# EAGLE board LM2596 (EAGLE 9.1.0)
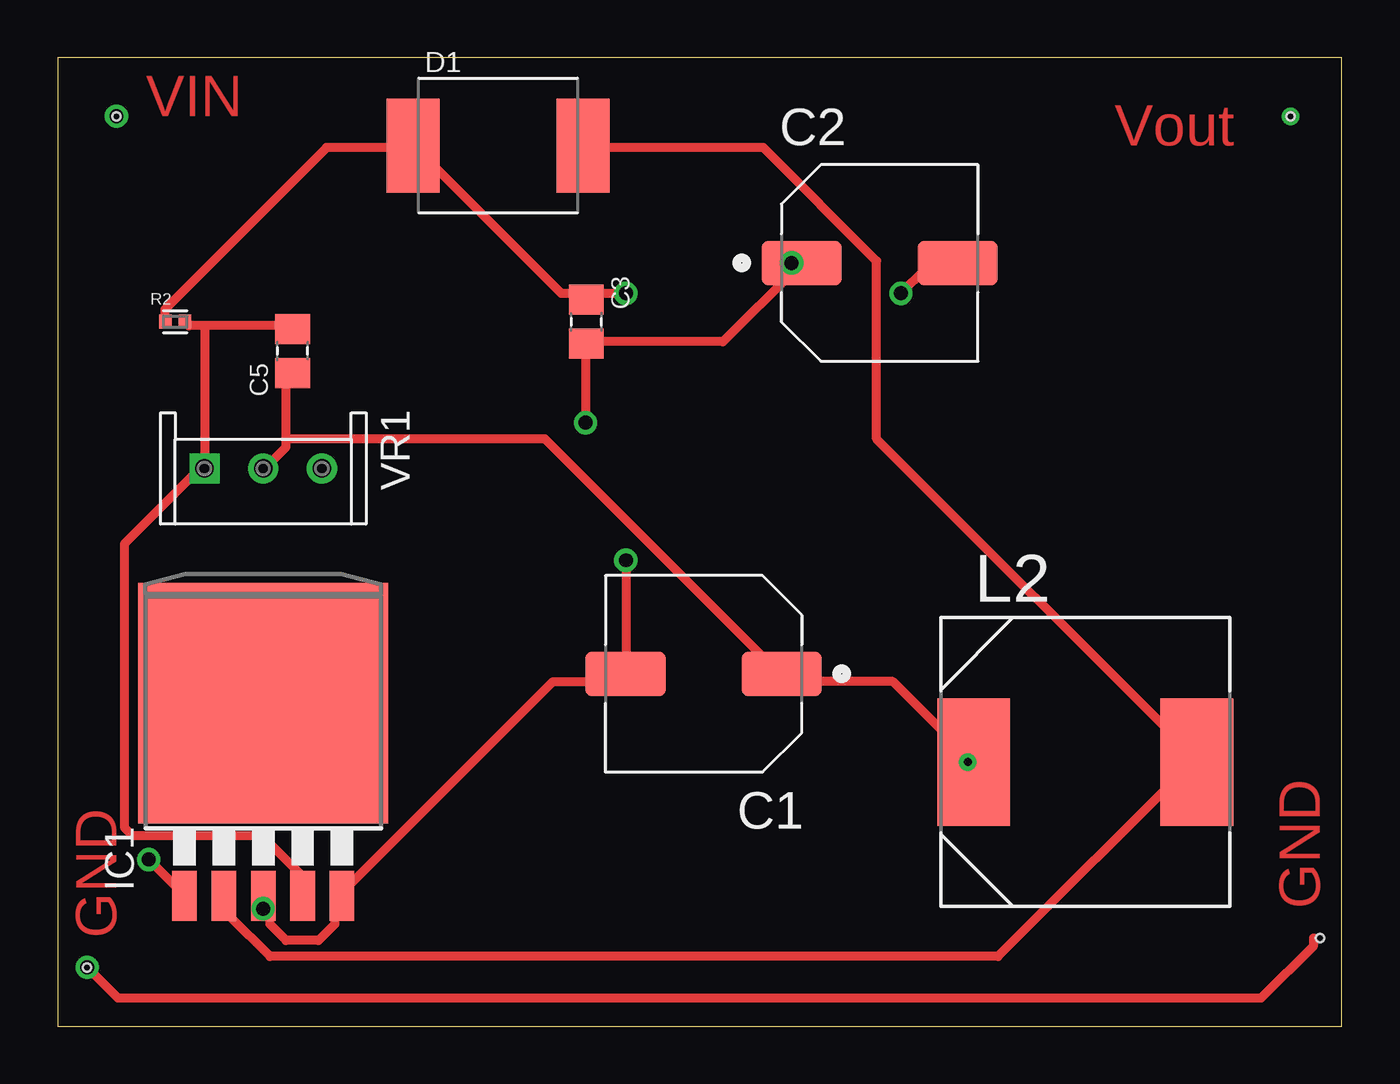
[diagram p0: board, top side]
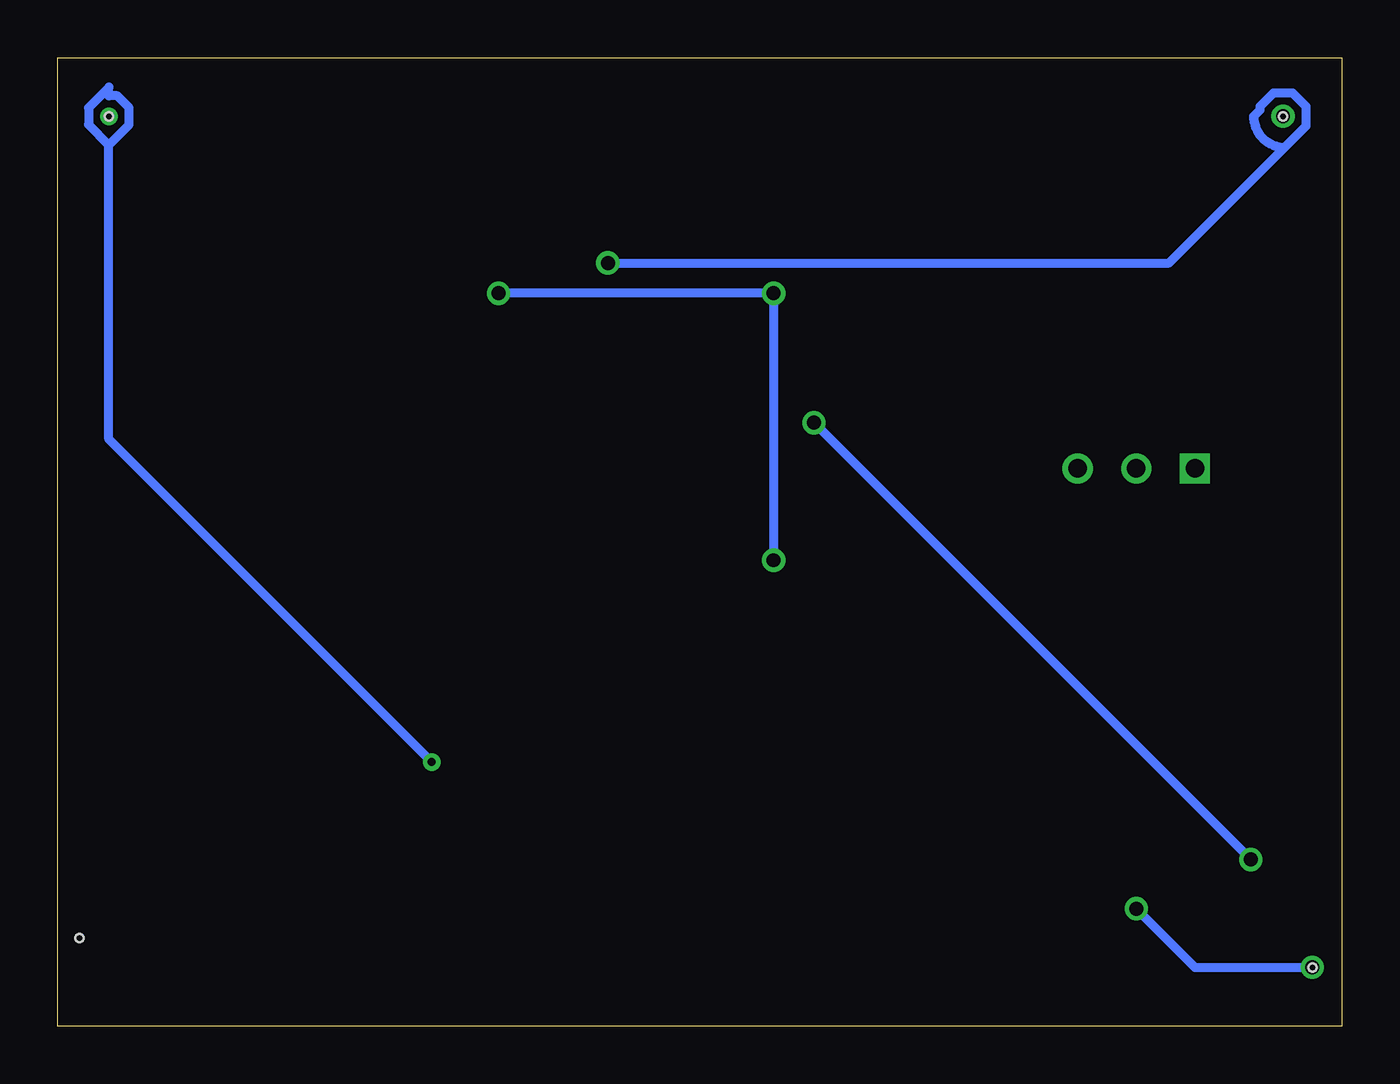
[diagram p1: board, bottom side, seen from below]

Size 55.55 x 41.9 mm. Coordinates in mm from the lower left corner, seen from the top.
Outline: 0,0 55.55,0 55.55,41.9 0,41.9 0,0
Copper layers (1*16): Top 0.035mm / dielectric 1.5mm / Bottom 0.035mm
Design rules "default": minimum track width 6mil, minimum drill 0.35mm, track to track 6mil, track to pad 6mil, pad to pad 6mil, via to via 6mil, smd to smd 6mil, copper to edge 40mil, drill to drill 6mil, minimum pad ring 10mil, minimum via ring 8mil, stop-mask expansion 4mil, vias tented up to drill 0mil, thermal gap 10mil
Net classes: 0 default: width 0.4 mm, drill 0.6 mm, clearance 0.3 mm
Holes 0.35 mm at 54.61,3.81 1.27,2.54 53.34,39.37 2.54,39.37

## Footprints (pad centres in the part's own frame; a part is rotated, then mirrored left to right if it is on the bottom)
CAPE830X690N = smd 3.46 x 1.92: 1 -3.375,0; 2 3.375,0
CAPC2012X135N = smd 1.3 x 1.5: 1 -0.95,0; 2 0.95,0
DO-214AB = smd 2.286 x 4.064: 1 -3.683,0; 2 3.683,0
TO263-5 = smd 1.067 x 2.159: 1 -3.404,-5.791; 2 -1.702,-5.791; 3 0,-5.791; 4 1.702,-5.791; 5 3.404,-5.791 | smd 10.8 x 10.41: 6 0,2.54
INDM125125X600N = smd 3.15 x 5.512: 1 -4.826,0; 2 4.826,0
RESC1005X40 = smd 0.54 x 0.6: 1 -0.43,0; 2 0.43,0
W = drill 0.8 square: 1 0,-2.54 | drill 0.8: 2 0,0; 3 0,2.54

## Placement (x,y rotation side)
C1  PCR1C221MCL1GS  [CAPE830X690N]  27.94,15.24 180 top
C2  PCR1C221MCL1GS  [CAPE830X690N]  35.56,33.02 0 top
C3  GRM219F51H104ZA01D  [CAPC2012X135N]  22.86,30.48 270 top
C5  GRM219F51H104ZA01D  [CAPC2012X135N]  10.16,29.21 90 top
D1  SMD-DIODE-SCHOTTKY-40V-3A(DO-214AB)  [DO-214AB]  19.05,38.1 0 top
IC1  LM2596S  [TO263-5]  8.89,11.43 0 top
L2  DR125-331-R  [INDM125125X600N]  44.45,11.43 0 top
R2  CH0402-330RGFPT  [RESC1005X40]  5.08,30.48 0 top
VR1  [W]  8.89,24.13 270 top

## Library data of the parts
C1 C2 = PCR1C221MCL1GS; AVAILABILITY: Unavailable; DESCRIPTION: 220uF 16V Polymer Aluminium Electrolytic Capacitor, CR Series 4000h 8.3x8.3x6.9mm; MF: Nichicon; MP: PCR1C221MCL1GS; PACKAGE: Radial Nichicon; PRICE: None
C3 C5 = GRM219F51H104ZA01D; AVAILABILITY: Good; DESCRIPTION: Capacitor: ceramic; MLCC; 100nF; 50V; Y5V; -20÷+80%; SMD; 0805; MF: Murata Electronics; MP: GRM219F51H104ZA01D; PACKAGE: 0805 Murata; PRICE: 0.04 USD
D1 = SMD-DIODE-SCHOTTKY-40V-3A_DO-214AB_; DESCRIPTION: Rectifier, Schottky; DO-214AB; 3.0A IF; 0.75V; 40V; 100A IFRM; 10000V/us; 1000pF; DIGI-KEY_PART_NUMBER: SS34-E3/57TGICT-ND; DIGI-KEY_PURCHASE_URL: https://www.digikey.ma/product-detail/en/vishay-semiconductor-diodes-division/SS34-E3-57T/SS34-E3-57TGICT-ND/1091684?utm_source=snapeda&utm_medium=aggregator&utm_campaign=symbol; MF: Vishay; MP: SS34-E3/57T; PACKAGE: DO-214 Vishay
IC1 = national-semiconductor; MF: NATIONAL SEMICONDUCTOR; MPN: LM2596S-ADJ/NOPB; OC_FARNELL: 9494367; OC_NEWARK: 41K3842
L2 = DR125-331-R; AVAILABILITY: Unavailable; DESCRIPTION: Inductor Power Shielded Drum Core 332.6u_OCL_H/330uH 20% 100KHz Ferrite 1.06A 482mOhm DCR T/R; MF: Eaton; MP: DR125-331-R; PACKAGE: Nonstandard Eaton; PRICE: None
R2 = CH0402-330RGFPT; AVAILABILITY: Bad; DESCRIPTION: Res Thin Film 0402 330 Ohm 2% 1/20W ±100ppm/°C Molded SMD Paper T/R; MF: Vishay; MP: CH0402-330RGFPT; PACKAGE: 0402 Vishay; PRICE: 3.75 USD
VR1 = 3296W; ADJUSTMENT_TYPE: Tope Adjustment; CATEGORY: Potentiometers, Variable Resistors; DESCRIPTION: TRIMMER 10K OHM 0.5W PC PIN; DOCUMENTATION_LINK: <a href="http://www.bourns.com/data/global/pdfs/3296.pdf">Datasheet</a>; DOCUMENTATION_URL: http://www.bourns.com/data/global/pdfs/3296.pdf; FAMILY: Trimmer Potentiometers; MANUFACTURER: Bourns Inc; MOUNTING_TYPE: Through Hole; NUMBER_OF_TURNS: 25; PART_NUMBER: 3296W-1-103LF; POWER: 0.5W, 1/2W; RESISTANCE: 10k; RESISTIVE_MATERIAL: Cermet; SERIES: Trimpt 3296 - Sealed; SIZE: Rectangular - 0.375" x 0.190" Face x 0.395" H (9.53mm x 4.83mm x 10.03mm); STANDARD_PACKAGE: 50; SUPPLIER_ITEM_LINK: <a href="http://www.digikey.com/product-detail/en/3296W-1-103LF/3296W-103LF-ND/1088045">Details</a>; SUPPLIER_ITEM_NUMBER: 3296W-103LF-ND; SUPPLIER_ITEM_URL: http://www.digikey.com/product-detail/en/3296W-1-103LF/3296W-103LF-ND/1088045; SUPPLIER_LINK: <a href="http://www.digikey.com">Home Page</a>; SUPPLIER_NAME: Digi-Key; SUPPLIER_URL: http://www.digikey.com; TEMPERATURE_COEFFICIENT: 100ppm/C; TERMINATION_STYLE: PC Pin; TOLERANCE: 10%

## Nets
GND: C1.2 C2.2 C3.1 D1.1 IC1.3 IC1.5 R2.1
N$1: D1.2 IC1.2 L2.2
N$2: C5.2 IC1.4 R2.2 VR1.1
VIN: C2.1 C3.2 IC1.1
VOUT: C1.1 C5.1 L2.1 VR1.2

## Tracks (layer width: path | path; a pad name or v marks a point on that pad's centre or on a via)
GND  (via drill 0.6)
  Top 0.4: IC1.3 9.18,5.46 9.18,4.41 9.88,3.71 11.28,3.71 11.98,4.41 11.98,5.46 IC1.5 12.33,5.81 21.43,14.91 24.23,14.91 C1.2 24.58,15.26 v24.58,20.16 | R2.1 4.63,30.66 4.63,31.01 11.63,38.01 15.13,38.01 D1.1 15.48,38.01 21.78,31.71 22.83,31.71 C3.1 23.18,31.71 v24.58,31.71 | v36.48,31.71 37.53,32.76 38.93,32.76 C2.2
  Bottom 0.4: v36.48,31.71 v24.58,31.71 v24.58,20.16
N$1
  Top 0.4: IC1.2 7.43,5.46 7.43,4.76 9.18,3.01 40.68,3.01 49.08,11.41 L2.2 49.08,11.76 35.43,25.41 35.43,33.11 30.53,38.01 22.83,38.01 D1.2
N$2
  Top 0.4: 6.38,30.31 9.88,30.31 C5.2 | 6.38,30.31 5.68,30.31 R2.2 | IC1.4 10.58,5.81 10.58,6.51 8.83,8.26 3.23,8.26 2.88,8.61 2.88,20.86 6.03,24.01 VR1.1 6.38,24.36 6.38,30.31
N$3  (via drill 0.6)
  Top 0.4: v1.27,2.54 2.59,1.22 52.07,1.22 54.33,3.48 54.33,3.81
  Bottom 0.4: v8.89,5.08 6.35,2.54 | 6.35,2.54 v1.27,2.54 | 6.35,2.54
N$4  (via drill 0.35)
  Bottom 0.4: v39.37,11.43 53.34,25.4 53.34,38.1 53.34,38.13 | 53.34,38.13 52.46,39.01 52.46,39.73 52.98,40.25 53.34,40.25 53.34,40.61 | 53.34,40.64 53.34,40.61 | 53.34,40.61 54.22,39.73 54.22,39.01 53.34,38.13
N$5  (via drill 0.35)
  other vias: 53.34,39.37
N$6  (via drill 0.6)
  Bottom 0.4: 2.47,38.03 7.47,33.02 v31.75,33.02 | 2.47,38.03 1.54,38.95 1.54,39.79 2.12,40.37 2.96,40.37 3.54,39.79 3.54,39.64 3.81,39.37 arc-90 2.47,38.03
N$7  (via drill 0.6)
  other vias: 2.54,39.37
VIN  (via drill 0.6)
  Top 0.4: C2.1 31.93,32.76 28.78,29.61 23.18,29.61 C3.2 22.83,29.26 v22.83,26.11 | v3.93,7.21 5.33,5.81 IC1.1
  Bottom 0.4: v22.83,26.11 v3.93,7.21
VOUT
  Top 0.4: 9.88,25.41 9.88,25.06 9.18,24.36 VR1.2 | 9.88,25.41 9.88,28.21 C5.1 | L2.1 39.28,11.76 36.13,14.91 31.58,14.91 C1.1 31.23,15.26 21.08,25.41 9.88,25.41

## Text on the board
Top: VIN | Vout | GND | GND